# Altium PCB test.PcbDoc
Units mil, origin at the board's own origin, x right, y up, seen from the top; angles counter-clockwise.
Board outline 6000 x 4000 mil, 2 copper layers (Top Layer, Bottom Layer); 227 components, 247 nets, 808 pads, 20 vias.
Unrouted connection lines stored in the file: 461.
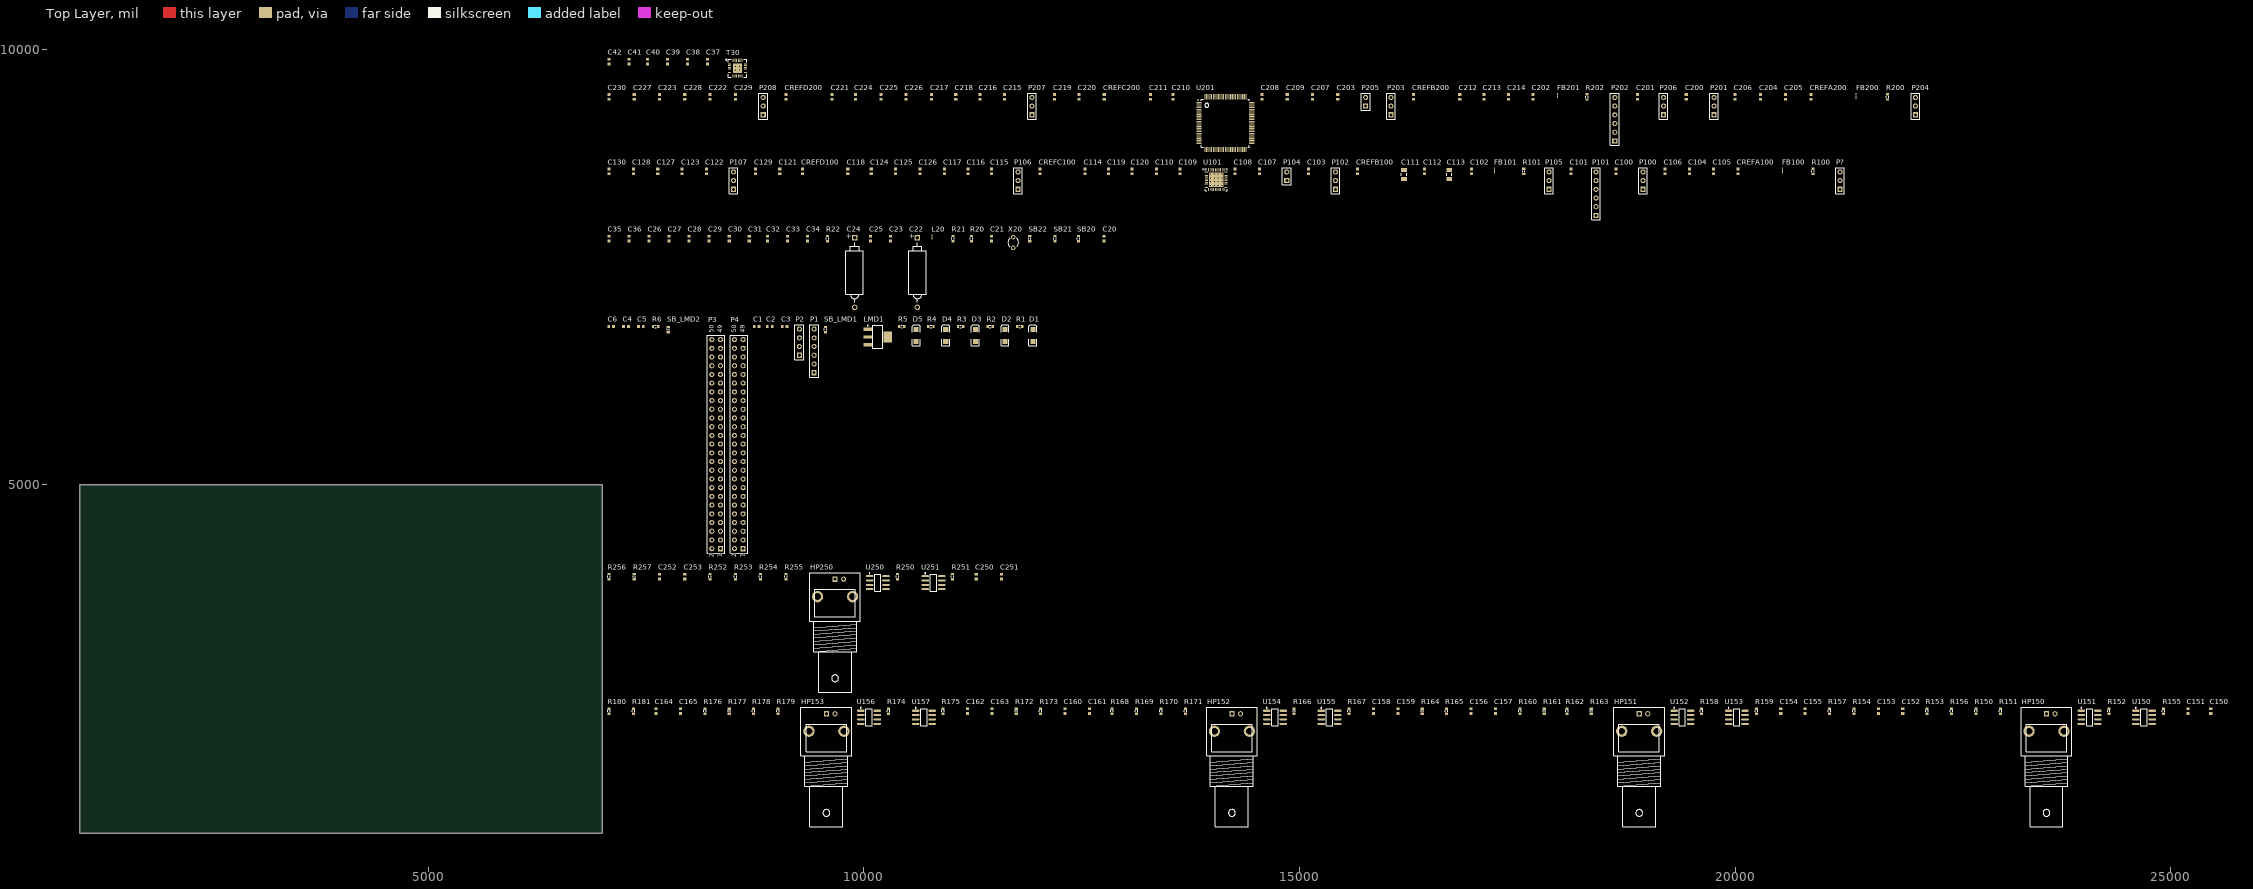
[diagram p0: Top Layer view]
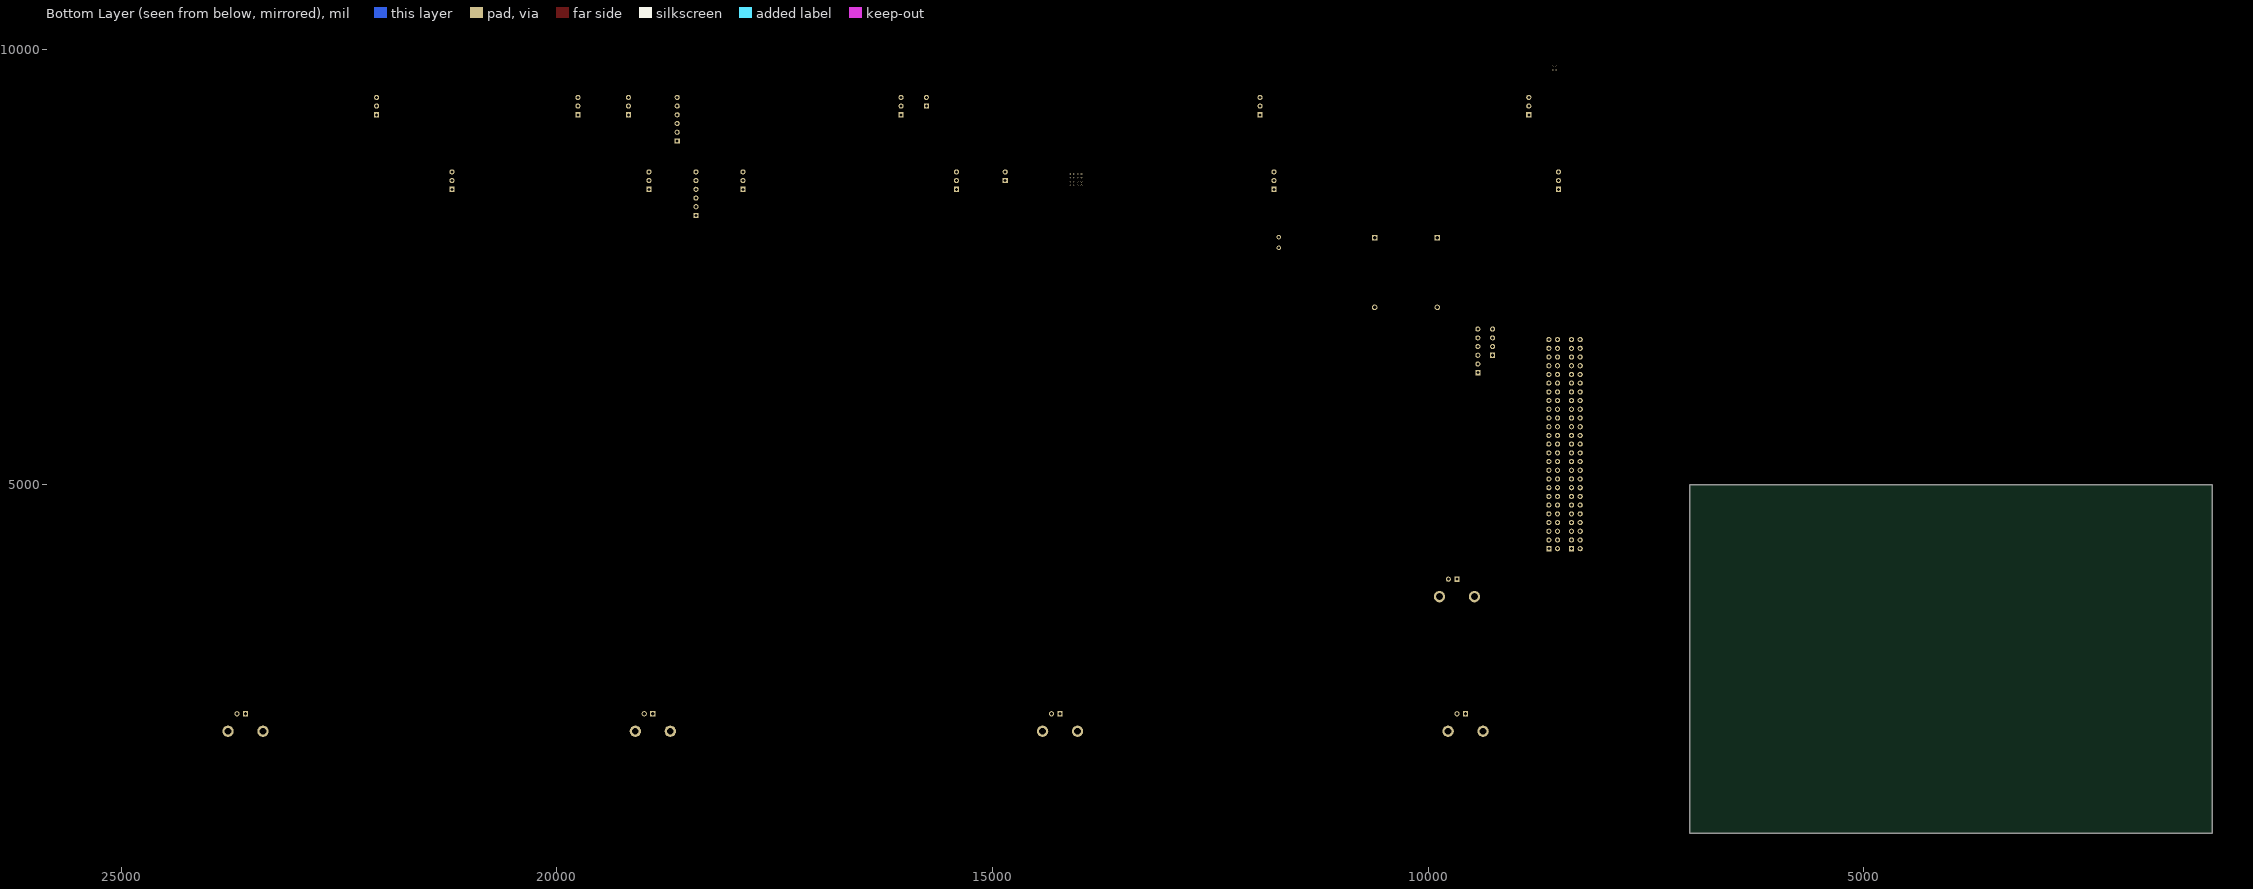
[diagram p1: Bottom Layer view, seen from below]

## Layer stack, top to bottom
Top Solder: solder mask 0.4, Solder Resist, Dk 3.5
Top Layer: signal copper 1.4
Dielectric 1: dielectric 12.6, FR-4, Dk 4.8
Bottom Layer: signal copper 1.4
Bottom Solder: solder mask 0.4, Solder Resist, Dk 3.5

## Board outline
1000,1000 7000,1000 7000,5000 1000,5000

## Design rules (kind name [scope] priority, off if disabled: settings)
Clearance [All] p1: gap=10
PolygonConnect [All] p1: connectstyle=Relief reliefconductorwidth=10 reliefentries=4 polygonreliefangle="90 Angle" airgapwidth=10
RoomDefinition U_RS-232 [InComponentClass('U_RS-232')] p1: confinementstyle=ConfineIn formatcopy=TRUE lockcomponents=FALSE outline 7045,9650 8680,9650 8680,10010 7045,10010
RoomDefinition U_MAXIM-ADC2 [InComponentClass('U_MAXIM-ADC2')] p2: confinementstyle=ConfineIn formatcopy=TRUE lockcomponents=FALSE outline 7045,8795 22265,8795 22265,9605 7045,9605
RoomDefinition U_MAXIM-ADC1 [InComponentClass('U_MAXIM-ADC1')] p3: confinementstyle=ConfineIn formatcopy=TRUE lockcomponents=FALSE outline 7045,8030 21280,8030 21280,8750 7045,8750
RoomDefinition U1 [InComponentClass('U1')] p4: confinementstyle=ConfineIn formatcopy=TRUE lockcomponents=FALSE outline 7045,6990 12920,6990 12920,7980 7045,7980
RoomDefinition HANC1.0_SCH [InComponentClass('HANC1.0_SCH')] p5: confinementstyle=ConfineIn formatcopy=TRUE lockcomponents=FALSE outline 7045,4150 12000,4150 12000,6945 7045,6945
RoomDefinition Filter_1 [InComponentClass('Filter1')] p6: confinementstyle=ConfineIn formatcopy=TRUE lockcomponents=FALSE outline 7045,2605 11785,2605 11785,4100 7045,4100
RoomDefinition Filter1 [InComponentClass('Filter1')] p7: confinementstyle=ConfineIn formatcopy=TRUE lockcomponents=FALSE outline 7045,2605 11785,2605 11785,4100 7045,4100
RoutingVias [All] p1: holewidth=28 width=50 viastyle="Through Hole" minholewidth=28 minwidth=50 maxholewidth=28 maxwidth=50
SolderMaskExpansion [All] p1: expansion=4
Width [All] p1: maxlimit=10 minlimit=10 preferedwidth=10
30 further rules are at their usual default settings.

## Classes and differential pairs
component class U_RS-232: C37 C38 C39 C40 C41 C42 T30
component class U_MAXIM-ADC2: C200 C201 C202 C203 C204 C205 C206 C207 C208 C209 C210 C211 C212 C213 C214 C215 C216 C217 C218 C219 C220 C221 C222 C223 C224 C225 C226 C227 C228 C229 C230 CREFA200 CREFB200 CREFC200 CREFD200 FB200 FB201 P201 P202 P203 P204 P205 P206 P207 P208 R200 R202 U200 U201 U202 U203
component class U_MAXIM-ADC1: C100 C101 C102 C103 C104 C105 C106 C107 C108 C109 C110 C111 C112 C113 C114 C115 C116 C117 C118 C119 C120 C121 C122 C123 C124 C125 C126 C127 C128 C129 C130 CREFA100 CREFB100 CREFC100 CREFD100 FB100 FB101 P100 P101 P102 P104 P105 P106 P107 P? R100 R101 U100 U101 U102 U103
component class U1: C20 C21 C22 C23 C24 C25 C26 C27 C28 C29 C30 C31 C32 C33 C34 C35 C36 L20 R20 R21 R22 SB20 SB21 SB22 U20 X20
component class HANC1.0_SCH: C1 C2 C3 C4 C5 C6 D1 D2 D3 D4 D5 LMA1 LMD1 P1 P2 P3 P4 R1 R2 R3 R4 R5 R6 SB_LMD1 SB_LMD2
component class Filter1: C250 C251 C252 C253 HP250 R250 R251 R252 R253 R254 R255 R256 R257 U250 U251

## Components (designator, comment, footprint, x,y, rotation, side; value= is the part's Value field where it differs from the comment)
C1 "Cap Semi" 1608[0603] 8770,6815 r0 top
C2 "Cap" 1608[0603] 8920,6815 r0 top
C3 "Cap Semi" 1608[0603] 9090,6815 r0 top
C4 "Cap Semi" 1608[0603] 7270,6815 r0 top
C5 "Cap Semi" 1608[0603] 7440,6815 r0 top
C6 "Cap Semi" 1608[0603] 7100,6815 r0 top
C20 "Cap" 1608[0603] 12755,7825 r90 top
C21 "Cap" 1608[0603] 11465,7825 r90 top
C22 "Cap Pol2" POLAR0.8 10615,7435 r90 top
C23 "Cap Semi" 1608[0603] 10305,7825 r90 top
C24 "Cap Pol2" POLAR0.8 9895,7435 r90 top
C25 "Cap Semi" 1608[0603] 10075,7825 r90 top
C26 "Cap Semi" 1608[0603] 7535,7825 r90 top
C27 "Cap Semi" 1608[0603] 7765,7825 r90 top
C28 "Cap Semi" 1608[0603] 7995,7825 r90 top
C29 "Cap Semi" 1608[0603] 8225,7825 r90 top
C30 "Cap Semi" 1608[0603] 8455,7825 r90 top
C31 "Cap Semi" 1608[0603] 8685,7825 r90 top
C32 "Cap Semi" 1608[0603] 8895,7825 r90 top
C33 "Cap Semi" 1608[0603] 9125,7825 r90 top
C34 "Cap Semi" 1608[0603] 9355,7825 r90 top
C35 "Cap Semi" 1608[0603] 7075,7825 r90 top
C36 "Cap Semi" 1608[0603] 7305,7825 r90 top
C37 "Cap Semi" 1608[0603] 8205,9855 r90 top
C38 "Cap Semi" 1608[0603] 7975,9855 r90 top
C39 "Cap Semi" 1608[0603] 7745,9855 r90 top
C40 "Cap Semi" 1608[0603] 7515,9855 r90 top
C41 "Cap Semi" 1608[0603] 7305,9855 r90 top
C42 "Cap Semi" 1608[0603] 7075,9855 r90 top
C100 "Cap Semi" 1608[0603] 18635,8595 r90 top
C101 "Cap Semi" 1608[0603] 18115,8595 r90 top
C102 "Cap Semi" 1608[0603] 16975,8595 r90 top
C103 "Cap Semi" 1608[0603] 15105,8595 r90 top
C104 "Cap Semi" 1608[0603] 19475,8595 r90 top
C105 "Cap Semi" 1608[0603] 19755,8595 r90 top
C106 "Cap" 1608[0603] 19195,8595 r90 top
C107 "Cap Semi" 1608[0603] 14540,8595 r90 top
C108 "Cap Semi" 1608[0603] 14260,8595 r90 top
C109 "Cap Semi" 1608[0603] 13630,8595 r90 top
C110 "Cap Semi" 1608[0603] 13360,8595 r90 top
C111 "Cap Semi" C1206 16200,8560 r90 top
C112 "Cap Semi" 1608[0603] 16435,8595 r90 top
C113 "Cap Semi" C1206 16720,8560 r90 top
C114 "Cap Semi" 1608[0603] 12540,8595 r90 top
C115 "Cap Semi" 1608[0603] 11465,8595 r90 top
C116 "Cap Semi" 1608[0603] 11195,8595 r90 top
C117 "Cap Semi" 1608[0603] 10925,8595 r90 top
C118 "Cap Semi" 1608[0603] 9815,8595 r90 top
C119 "Cap Semi" 1608[0603] 12810,8595 r90 top
C120 "Cap Semi" 1608[0603] 13080,8595 r90 top
C121 "Cap Semi" 1608[0603] 9035,8595 r90 top
C122 "Cap Semi" 1608[0603] 8195,8595 r90 top
C123 "Cap Semi" 1608[0603] 7915,8595 r90 top
C124 "Cap Semi" 1608[0603] 10085,8595 r90 top
C125 "Cap Semi" 1608[0603] 10365,8595 r90 top
C126 "Cap Semi" 1608[0603] 10645,8595 r90 top
C127 "Cap Semi" 1608[0603] 7635,8595 r90 top
C128 "Cap Semi" 1608[0603] 7355,8595 r90 top
C129 "Cap Semi" 1608[0603] 8755,8595 r90 top
C130 "Cap Semi" 1608[0603] 7075,8595 r90 top
C150 "Cap Semi" 1608[0603] 25460,2400 r90 top
C151 "Cap Semi" 1608[0603] 25200,2400 r90 top
C152 "Cap Semi" 1608[0603] 21925,2400 r90 top
C153 "Cap Semi" 1608[0603] 21645,2400 r90 top
C154 "Cap Semi" 1608[0603] 20525,2400 r90 top
C155 "Cap Semi" 1608[0603] 20805,2400 r90 top
C156 "Cap Semi" 1608[0603] 16970,2400 r90 top
C157 "Cap Semi" 1608[0603] 17250,2400 r90 top
C158 "Cap Semi" 1608[0603] 15850,2400 r90 top
C159 "Cap Semi" 1608[0603] 16130,2400 r90 top
C160 "Cap Semi" 1608[0603] 12310,2400 r90 top
C161 "Cap Semi" 1608[0603] 12590,2400 r90 top
C162 "Cap Semi" 1608[0603] 11190,2400 r90 top
C163 "Cap Semi" 1608[0603] 11470,2400 r90 top
C164 "Cap Semi" 1608[0603] 7615,2400 r90 top
C165 "Cap Semi" 1608[0603] 7895,2400 r90 top
C200 "Cap Semi" 1608[0603] 19440,9450 r90 top
C201 "Cap Semi" 1608[0603] 18880,9450 r90 top
C202 "Cap Semi" 1608[0603] 17680,9450 r90 top
C203 "Cap Semi" 1608[0603] 15440,9450 r90 top
C204 "Cap Semi" 1608[0603] 20290,9450 r90 top
C205 "Cap Semi" 1608[0603] 20580,9450 r90 top
C206 "Cap Semi" 1608[0603] 20000,9450 r90 top
C207 "Cap Semi" 1608[0603] 15150,9450 r90 top
C208 "10uF" 1608[0603] 14570,9450 r90 top
C209 "Cap Semi" 1608[0603] 14860,9450 r90 top
C210 "Cap Semi" 1608[0603] 13550,9450 r90 top
C211 "Cap Semi" 1608[0603] 13290,9450 r90 top
C212 "Cap Semi" 1608[0603] 16840,9450 r90 top
C213 "Cap Semi" 1608[0603] 17120,9450 r90 top
C214 "Cap Semi" 1608[0603] 17400,9450 r90 top
C215 "Cap Semi" 1608[0603] 11615,9450 r90 top
C216 "Cap Semi" 1608[0603] 11335,9450 r90 top
C217 "Cap Semi" 1608[0603] 10775,9450 r90 top
C218 "Cap Semi" 1608[0603] 11055,9450 r90 top
C219 "Cap Semi" 1608[0603] 12190,9450 r90 top
C220 "Cap Semi" 1608[0603] 12470,9450 r90 top
C221 "Cap Semi" 1608[0603] 9635,9450 r90 top
C222 "Cap Semi" 1608[0603] 8235,9450 r90 top
C223 "Cap Semi" 1608[0603] 7655,9450 r90 top
C224 "Cap Semi" 1608[0603] 9905,9450 r90 top
C225 "Cap Semi" 1608[0603] 10195,9450 r90 top
C226 "Cap Semi" 1608[0603] 10485,9450 r90 top
C227 "Cap Semi" 1608[0603] 7365,9450 r90 top
C228 "Cap Semi" 1608[0603] 7945,9450 r90 top
C229 "Cap Semi" 1608[0603] 8525,9450 r90 top
C230 "Cap Semi" 1608[0603] 7075,9450 r90 top
C250 "Cap Semi" 1608[0603] 11290,3945 r90 top
C251 "Cap Semi" 1608[0603] 11580,3945 r90 top
C252 "Cap Semi" 1608[0603] 7655,3945 r90 top
C253 "Cap Semi" 1608[0603] 7945,3945 r90 top
CREFA100 "Cap Semi" 1608[0603] 20035,8595 r90 top
CREFA200 "Cap Semi" 1608[0603] 20870,9450 r90 top
CREFB100 "Cap Semi" 1608[0603] 15665,8595 r90 top
CREFB200 "Cap Semi" 1608[0603] 16310,9450 r90 top
CREFC100 "Cap Semi" 1608[0603] 12020,8595 r90 top
CREFC200 "Cap Semi" 1608[0603] 12760,9450 r90 top
CREFD100 "Cap Semi" 1608[0603] 9295,8595 r90 top
CREFD200 "Cap Semi" 1608[0603] 9105,9450 r90 top
D1 "LED2" 3.2X1.6X1.1 11940,6710 r90 top
D2 "LED2" 3.2X1.6X1.1 11620,6710 r90 top
D3 "LED2" 3.2X1.6X1.1 11280,6710 r90 top
D4 "LED2" 3.2X1.6X1.1 10940,6710 r90 top
D5 "LED2" 3.2X1.6X1.1 10600,6710 r90 top
FB100 "FerriteBead" 0603 20545,8615 r90 top
FB101 "FerriteBead" 0603 17240,8615 r90 top
FB200 "FerriteBead" 0603 21390,9470 r90 top
FB201 "FerriteBead" 0603 17960,9470 r90 top
HP150 "BNC" "BNC_RA CON" 23575,2370 r90 top
HP151 "BNC" "BNC_RA CON" 18900,2370 r90 top
HP152 "BNC" "BNC_RA CON" 14225,2370 r90 top
HP153 "BNC" "BNC_RA CON" 9570,2370 r90 top
HP250 "BNC" "BNC_RA CON" 9670,3915 r90 top
L20 "Inductor" 0603 10780,7845 r90 top
LMD1 "LM3940" SOT223_N 10160,6695 r0 top
P1 "SWD" HDR1X6 9430,6285 r90 top
P2 "4AUX" HDR1X4 9260,6485 r90 top
P3 "Header 25X2" HDR2X25 8355,4265 r90 top
P4 "Header 25X2" HDR2X25 8615,4265 r90 top
P100 "Header 3" HDR1X3 18945,8390 r90 top
P101 "Header 6" HDR1X6 18405,8090 r90 top
P102 "Header 3" HDR1X3 15415,8390 r90 top
P104 "Header 2" HDR1X2 14855,8490 r90 top
P105 "Header 3" HDR1X3 17865,8390 r90 top
P106 "Header 3" HDR1X3 11770,8390 r90 top
P107 "Header 3" HDR1X3 8505,8390 r90 top
P201 "Header 3" HDR1X3 19760,9245 r90 top
P202 "Header 6" HDR1X6 18620,8945 r90 top
P203 "Header 3" HDR1X3 16050,9245 r90 top
P204 "Header 3" HDR1X3 22070,9245 r90 top
P205 "Header 2" HDR1X2 15760,9345 r90 top
P206 "Header 3" HDR1X3 19180,9245 r90 top
P207 "Header 3" HDR1X3 11930,9245 r90 top
P208 "Header 3" HDR1X3 8845,9245 r90 top
P? "Header 3" HDR1X3 21205,8390 r90 top
R1 "Res3" J1-0603 11790,6815 r0 top
R2 "Res3" J1-0603 11450,6815 r0 top
R3 "Res3" J1-0603 11110,6815 r0 top
R4 "Res3" J1-0603 10770,6815 r0 top
R5 "Res3" J1-0603 10435,6815 r0 top
R6 "Res3" J1-0603 7610,6815 r0 top
R20 "Res3" J1-0603 11235,7825 r90 top
R21 "Res3" J1-0603 11025,7825 r90 top
R22 "Res3" J1-0603 9585,7825 r90 top
R100 "Res3" J1-0603 20895,8595 r90 top
R101 "Res3" J1-0603 17575,8595 r90 top
R150 "Res3" J1-0603 22765,2400 r90 top
R151 "Res3" J1-0603 23045,2400 r90 top
R152 "Res3" J1-0603 24290,2400 r90 top
R153 "Res3" J1-0603 22205,2400 r90 top
R154 "Res3" J1-0603 21365,2400 r90 top
R155 "Res3" J1-0603 24920,2400 r90 top
R156 "Res3" J1-0603 22485,2400 r90 top
R157 "Res3" J1-0603 21085,2400 r90 top
R158 "Res3" J1-0603 19615,2400 r90 top
R159 "Res3" J1-0603 20245,2400 r90 top
R160 "Res3" J1-0603 17530,2400 r90 top
R161 "Res3" J1-0603 17810,2400 r90 top
R162 "Res3" J1-0603 18070,2400 r90 top
R163 "Res3" J1-0603 18350,2400 r90 top
R164 "Res3" J1-0603 16410,2400 r90 top
R165 "Res3" J1-0603 16690,2400 r90 top
R166 "Res3" J1-0603 14940,2400 r90 top
R167 "Res3" J1-0603 15570,2400 r90 top
R168 "Res3" J1-0603 12850,2400 r90 top
R169 "Res3" J1-0603 13130,2400 r90 top
R170 "Res3" J1-0603 13410,2400 r90 top
R171 "Res3" J1-0603 13690,2400 r90 top
R172 "Res3" J1-0603 11750,2400 r90 top
R173 "Res3" J1-0603 12030,2400 r90 top
R174 "Res3" J1-0603 10285,2400 r90 top
R175 "Res3" J1-0603 10910,2400 r90 top
R176 "Res3" J1-0603 8175,2400 r90 top
R177 "Res3" J1-0603 8455,2400 r90 top
R178 "Res3" J1-0603 8735,2400 r90 top
R179 "Res3" J1-0603 9015,2400 r90 top
R180 "Res3" J1-0603 7075,2400 r90 top
R181 "Res3" J1-0603 7355,2400 r90 top
R200 "Res3" J1-0603 21750,9450 r90 top
R202 "Res3" J1-0603 18300,9450 r90 top
R250 "Res3" J1-0603 10385,3945 r90 top
R251 "Res3" J1-0603 11020,3945 r90 top
R252 "Res3" J1-0603 8235,3945 r90 top
R253 "Res3" J1-0603 8525,3945 r90 top
R254 "Res3" J1-0603 8815,3945 r90 top
R255 "Res3" J1-0603 9105,3945 r90 top
R256 "Res3" J1-0603 7075,3945 r90 top
R257 "Res3" J1-0603 7365,3945 r90 top
SB20 "Res3" J1-0603 12465,7825 r90 top
SB21 "Res3" J1-0603 12195,7825 r90 top
SB22 "Res3" J1-0603 11905,7825 r90 top
SB_LMD1 "Res3" J1-0603 9560,6780 r90 top
SB_LMD2 "Res3" J1-0603 7755,6780 r90 top
T30 "TRS3122" QFN50P485X485X100_HS-25N 8550,9780 r0 top
U101 "MAX11043" QFN50P600X600X80_HS-41N 14045,8500 r0 top
U150 "OP262TRZ-EP" ADI-R-8_N 24695,2330 r0 top
U151 "OP262TRZ-EP" ADI-R-8_N 24070,2330 r0 top
U152 "OP262TRZ-EP" ADI-R-8_N 19395,2330 r0 top
U153 "OP262TRZ-EP" ADI-R-8_N 20020,2330 r0 top
U154 "OP262TRZ-EP" ADI-R-8_N 14720,2330 r0 top
U155 "OP262TRZ-EP" ADI-R-8_N 15345,2330 r0 top
U156 "OP262TRZ-EP" ADI-R-8_N 10060,2330 r0 top
U157 "OP262TRZ-EP" ADI-R-8_N 10690,2330 r0 top
U201 "MAX11043" QFP50P1600X1600X160-100N 14150,9150 r0 top
U250 "OP262TRZ-EP" ADI-R-8_N 10160,3875 r0 top
U251 "OP262TRZ-EP" ADI-R-8_N 10800,3875 r0 top
X20 "16MHz" R38 11715,7780 r0 top

## Footprints (in the part's own frame and the unit in brackets; to place one, negate y for a bottom-side part, rotate by r counter-clockwise, add the part's x,y. Pads: shape width x height; smd on the part's side, far side on the other; paste and mask are expansions set on the pad)
3.2X1.6X1.1 [mm] "SMT LED; 2 Flat Leads"
  rect 1.5x1.5 smd: 1(-1.75,0) 2(1.75,0)
  silkscreen extent -2.9,-1.15 3.2,1.15
0603 [mm] "Chip Inductor, Body 0.6x0.3mm, IPC High Density"
  rect 0.5x0.3 smd: 1(-0.35,0) 2(0.35,0)
  silkscreen extent -0.9,-0.05 -0.9,0.05, body extent -0.33,-0.18 0.33,0.18, height 0.55
1608[0603] [mm] "Chip Capacitor, Body 1.6x0.8mm, IPC High Density"
  rect 0.8x0.9 smd: 1(-0.7,0) 2(0.7,0)
  body extent -0.87,-0.48 0.87,0.48, height 1.3
ADI-R-8_N [mm] "SOIC, 8-Leads, Body 4.9x3.9mm, Pitch 1.27mm, IPC Medium Density"
  oval 2.2x0.6 smd: 1(-2.4,1.905) 2(-2.4,0.635) 3(-2.4,-0.635) 4(-2.4,-1.905) 5(2.4,-1.905) 6(2.4,-0.635) 7(2.4,0.635) 8(2.4,1.905)
  silkscreen extent -2.52,-2.5 0.9,2.88, body extent -2,-2.5 2,2.5, height 1.75
"BNC_RA CON" [mm] "Connector; BNC Elbow"
  rect 1.5x1.5 hole 0.9: 1(0,0)
  round 3.3 hole 2: 2(-5.1,-5.1) 2(-5.1,5.1)
  round 1.5 hole 0.9: 2(0,-2.5)
  silkscreen extent -33,-7.4 1.9,7.4
C1206 [mm] "Chip Capacitor, Body 3.2x1.6mm, IPC High Density"
  rect 1.1x1.7 smd: 1(-1.35,0) 2(1.35,0)
  silkscreen extent -0.4,-0.75 0.4,0.75, body extent -1.7,-0.9 1.7,0.9, height 1.3
HDR1X2 [mm] "Connector; Header; 2 Position"
  rect 1.5x1.5 hole 0.9: 1(0,0)
  round 1.5 hole 0.9: 2(2.54,0)
  silkscreen extent -1.27,-1.27 3.81,1.27
HDR1X3 [mm] "Connector; Header; 3 Position"
  rect 1.5x1.5 hole 0.9: 1(0,0)
  round 1.5 hole 0.9: 2(2.54,0) 3(5.08,0)
  silkscreen extent -1.27,-1.27 6.35,1.27
HDR1X4 [mm] "Connector; Header; 4 Position"
  rect 1.5x1.5 hole 0.9: 1(0,0)
  round 1.5 hole 0.9: 2(2.54,0) 3(5.08,0) 4(7.62,0)
  silkscreen extent -1.27,-1.27 8.89,1.27
HDR1X6 [mm] "Connector; Header; 6 Position"
  rect 1.5x1.5 hole 0.9: 1(0,0)
  round 1.5 hole 0.9: 2(2.54,0) 3(5.08,0) 4(7.62,0) 5(10.16,0) 6(12.7,0)
  silkscreen extent -1.27,-1.27 13.97,1.27
HDR2X25 [mm] "Connector; Header; 25x2 Position"
  rect 1.5x1.5 hole 0.9: 1(0,0)
  round 1.5 hole 0.9: 2(0,2.54) 3(2.54,0) 4(2.54,2.54) 5(5.08,0) 6(5.08,2.54) 7(7.62,0) 8(7.62,2.54) 9(10.16,0) 10(10.16,2.54) 11(12.7,0) 12(12.7,2.54) 13(15.24,0) 14(15.24,2.54) 15(17.78,0) 16(17.78,2.54) 17(20.32,0) 18(20.32,2.54) 19(22.86,0) 20(22.86,2.54) 21(25.4,0) 22(25.4,2.54) 23(27.94,0) 24(27.94,2.54) 25(30.48,0) 26(30.48,2.54) 27(33.02,0) 28(33.02,2.54) 29(35.56,0) 30(35.56,2.54) 31(38.1,0) 32(38.1,2.54) 33(40.64,0) 34(40.64,2.54) 35(43.18,0) 36(43.18,2.54) 37(45.72,0) 38(45.72,2.54) 39(48.26,0) 40(48.26,2.54) 41(50.8,0) 42(50.8,2.54) 43(53.34,0) 44(53.34,2.54) 45(55.88,0) 46(55.88,2.54) 47(58.42,0) 48(58.42,2.54) 49(60.96,0) 50(60.96,2.54)
  silkscreen extent -1.27,-1.27 62.23,3.81
J1-0603 [mm] "Chip Resistor, Body 1.6x0.8mm, IPC High Density"
  rect 0.7x0.9 smd: 1(-0.75,0) 2(0.75,0)
  silkscreen extent -0.2,-0.35 0.2,0.35, body extent -0.85,-0.48 0.85,0.48, height 0.9
POLAR0.8 [mm] "Polarized Capacitor; 2 Leads"
  rect 1.6x1.6 hole 1: 1(10.16,0)
  round 1.6 hole 1: 2(-10.16,0)
  silkscreen extent -8.64,-2.54 8.64,2.54
QFN50P485X485X100_HS-25N [mm] "QFN, 24-Leads, Body 4.85x4.85mm, Pitch 0.50mm, Thermal Pad 2.70x2.70mm, IPC Medium Density"
  oval 0.95x0.25 smd: 1(-2.3,1.25) 2(-2.3,0.75) 3(-2.3,0.25) 4(-2.3,-0.25) 5(-2.3,-0.75) 6(-2.3,-1.25) 13(2.3,-1.25) 14(2.3,-0.75) 15(2.3,-0.25) 16(2.3,0.25) 17(2.3,0.75) 18(2.3,1.25)
  oval 0.25x0.95 smd: 7(-1.25,-2.3) 8(-0.75,-2.3) 9(-0.25,-2.3) 10(0.25,-2.3) 11(0.75,-2.3) 12(1.25,-2.3) 19(1.25,2.3) 20(0.75,2.3) 21(0.25,2.3) 22(-0.25,2.3) 23(-0.75,2.3) 24(-1.25,2.3)
  rect 2.7x2.7 smd: 25(0,0)
  silkscreen extent -3.4,-2.62 2.62,2.63, body extent -2.48,-2.47 2.47,2.48, height 1
QFN50P600X600X80_HS-41N [mm] "QFN, 40-Leads, Body 6.00x6.00mm, Pitch 0.50mm, Thermal Pad 4.10x4.10mm, IPC Medium Density"
  oval 0.95x0.25 smd: 1(-2.875,2.25) 2(-2.875,1.75) 3(-2.875,1.25) 4(-2.875,0.75) 5(-2.875,0.25) 6(-2.875,-0.25) 7(-2.875,-0.75) 8(-2.875,-1.25) 9(-2.875,-1.75) 10(-2.875,-2.25) 21(2.875,-2.25) 22(2.875,-1.75) 23(2.875,-1.25) 24(2.875,-0.75) 25(2.875,-0.25) 26(2.875,0.25) 27(2.875,0.75) 28(2.875,1.25) 29(2.875,1.75) 30(2.875,2.25)
  oval 0.25x0.95 smd: 11(-2.25,-2.875) 12(-1.75,-2.875) 13(-1.25,-2.875) 14(-0.75,-2.875) 15(-0.25,-2.875) 16(0.25,-2.875) 17(0.75,-2.875) 18(1.25,-2.875) 19(1.75,-2.875) 20(2.25,-2.875) 31(2.25,2.875) 32(1.75,2.875) 33(1.25,2.875) 34(0.75,2.875) 35(0.25,2.875) 36(-0.25,2.875) 37(-0.75,2.875) 38(-1.25,2.875) 39(-1.75,2.875) 40(-2.25,2.875)
  rect 4.1x4.1 smd: 41(0,0)
  silkscreen extent -3.97,-3.2 3.2,3.2, body extent -3.05,-3.05 3.05,3.05, height 0.8
QFP50P1600X1600X160-100N [mm]
  rect 1.5x0.3 smd paste-25.4 mask-25.4: 1(-7.67,6) 2(-7.67,5.5) 3(-7.67,5) 4(-7.67,4.5) 5(-7.67,4) 6(-7.67,3.5) 7(-7.67,3) 8(-7.67,2.5) 9(-7.67,2) 10(-7.67,1.5) 11(-7.67,1) 12(-7.67,0.5) 13(-7.67,0) 14(-7.67,-0.5) 15(-7.67,-1) 16(-7.67,-1.5) 17(-7.67,-2) 18(-7.67,-2.5) 19(-7.67,-3) 20(-7.67,-3.5) 21(-7.67,-4) 22(-7.67,-4.5) 23(-7.67,-5) 24(-7.67,-5.5) 25(-7.67,-6) 51(7.67,-6) 52(7.67,-5.5) 53(7.67,-5) 54(7.67,-4.5) 55(7.67,-4) 56(7.67,-3.5) 57(7.67,-3) 58(7.67,-2.5) 59(7.67,-2) 60(7.67,-1.5) 61(7.67,-1) 62(7.67,-0.5) 63(7.67,0) 64(7.67,0.5) 65(7.67,1) 66(7.67,1.5) 67(7.67,2) 68(7.67,2.5) 69(7.67,3) 70(7.67,3.5) 71(7.67,4) 72(7.67,4.5) 73(7.67,5) 74(7.67,5.5) 75(7.67,6)
  rect 0.3x1.5 smd paste-25.4 mask-25.4: 26(-6,-7.67) 27(-5.5,-7.67) 28(-5,-7.67) 29(-4.5,-7.67) 30(-4,-7.67) 31(-3.5,-7.67) 32(-3,-7.67) 33(-2.5,-7.67) 34(-2,-7.67) 35(-1.5,-7.67) 36(-1,-7.67) 37(-0.5,-7.67) 38(0,-7.67) 39(0.5,-7.67) 40(1,-7.67) 41(1.5,-7.67) 42(2,-7.67) 43(2.5,-7.67) 44(3,-7.67) 45(3.5,-7.67) 46(4,-7.67) 47(4.5,-7.67) 48(5,-7.67) 49(5.5,-7.67) 50(6,-7.67) 76(6,7.67) 77(5.5,7.67) 78(5,7.67) 79(4.5,7.67) 80(4,7.67) 81(3.5,7.67) 82(3,7.67) 83(2.5,7.67) 84(2,7.67) 85(1.5,7.67) 86(1,7.67) 87(0.5,7.67) 88(0,7.67) 89(-0.5,7.67) 90(-1,7.67) 91(-1.5,7.67) 92(-2,7.67) 93(-2.5,7.67) 94(-3,7.67) 95(-3.5,7.67) 96(-4,7.67) 97(-4.5,7.67) 98(-5,7.67) 99(-5.5,7.67) 100(-6,7.67)
  silkscreen extent -8.1,-7 7,7
R38 [mm] "Crystal, Thru-Hole; 2 Leads; Body 3.1 x 8.2 mm (Dia.xH)"
  round 1.3 hole 0.7: 1(0,1.55) 2(0,-1.55)
  silkscreen extent -1.55,-1.19 1.55,1.17
SOT223_N [mm] "SOT223, 4-Leads, Body 6.5x3.5mm, Pitch 2.3mm, Lead Span 7mm, IPC Medium Density"
  rect 2.4x1 smd: 1(-2.9,2.3) 2(-2.9,0) 3(-2.9,-2.3)
  rect 2.4x3.3 smd: 4(2.9,0)
  silkscreen extent -3.02,-3.35 1.4,3.47, body extent -1.85,-3.35 1.85,3.35, height 1.7

## Part data
C1 C3 C4 C5 C6 C23 C25 C26 C27 C28 C29 C30 C31 C32 C33 C34 C35 C36 C37 C38 C39 C40 C41 C42 C100 C101 C102 C103 C104 C105 C107 C108 C109 C110 C111 C112 C113 C114 C115 C116 C117 C118 C119 C120 C121 C122 C123 C124 C125 C126 C127 C128 C129 C130 C150 C151 C152 C153 C154 C155 C156 C157 C158 C159 C160 C161 C162 C163 C164 C165 C200 C201 C202 C203 C204 C205 C206 C207 C209 C210 C211 C212 C213 C214 C215 C216 C217 C218 C219 C220 C221 C222 C223 C224 C225 C226 C227 C228 C229 C230 C250 C251 C252 C253 CREFA100 CREFA200 CREFB100 CREFB200 CREFC100 CREFC200 CREFD100 CREFD200: "Capacitor (Semiconductor SIM Model)"
C2 C20 C21 C106 C208: library part "Cap Semi", "Capacitor (Semiconductor SIM Model)"
C22 C24: "Polarized Capacitor (Axial)"
D1 D2 D3 D4 D5: "Typical RED, GREEN, YELLOW, AMBER GaAs LED"
FB100 FB101 FB200 FB201: library part Inductor, "Inductor"
HP150 HP151 HP152 HP153 HP250: "BNC Elbow Connector"
LMD1 T30: library part Component_1
P1: library part "Header 6", "Header, 6-Pin"
P2: library part "Header 4", "Header, 4-Pin"
P3 P4: "Header, 25-Pin, Dual row"
P100 P102 P105 P106 P107 P201 P203 P204 P206 P207 P208 P?: "Header, 3-Pin"
P101 P202: "Header, 6-Pin"
P104 P205: "Header, 2-Pin"
R1 R2 R3 R4 R5 R6 R20 R21 R22 R100 R101 R150 R151 R152 R153 R154 R155 R156 R157 R158 R159 R160 R161 R162 R163 R164 R165 R166 R167 R168 R169 R170 R171 R172 R173 R174 R175 R176 R177 R178 R179 R180 R181 R200 R202 R250 R251 R252 R253 R254 R255 R256 R257 SB21 SB_LMD1 SB_LMD2: "Resistor"
SB20: "SB PH0"
SB22: "SB_PH1"
U150 U151 U152 U153 U154 U155 U156 U157 U250 U251: "Double Channel Wide Bandwidth Operational Amplifier, 15 MHz BW, 13 V/us SR, Military, 8-pin SOIC (R-8), Tube"
X20: library part XTAL, "Crystal Oscillator"

## Via types
v1: diameter 19.68, hole 7.87, Top Layer to Bottom Layer, 20 vias

## Nets (pads, with @x,y where several pads share a name; then routed paths per layer and width w, separated by ;. In a path a pad name is that pad's centre, name@x,y a point inside that pad or via, vN(x,y) a via of type N, cw(c..) or ccw(c..) an arc to the next point about the centre after c; other vN are vias at no path point)
5V: P2.1 P4.3 P4.4 SB_LMD1.1 SB_LMD2.1
A3V3: C4.2 P204.3 P?.3
AGND: C2.1 C4.1 C104.2 C105.2 C106.2 C109.2 C110.2 C114.2 C121.1 C124.1 C125.2 C126.1 C129.2 C130.1 C152.1 C156.1 C157.1 C160.1 C161.1 C164.1 C165.1 C204.2 C205.2 C206.2 C209.2 C210.2 C211.2 C221.1 C224.1 C225.2 C226.1 C229.2 C230.1 C252.1 C253.1 CREFA100.1 CREFA200.1 CREFB100.1 CREFB200.1 CREFC100.1 CREFC200.1 CREFD100.1 CREFD200.1 HP151.2 HP152.2 HP153.2 HP250.2 LMD1.4 P2.4 P100.3 P102.3 P106.3 P107.3 P201.3 P203.3 P207.3 P208.3 R6.2 R154.1 R157.1 R164.1 R165.1 R172.1 R173.1 R180.1 R181.1 R256.1 R257.1 U101.6 U101.17 U101.24 U101.33 U101.35 U150.4 U151.4 U152.4 U153.4 U154.4 U155.4 U156.4 U157.4 U201.6 U201.17 U201.24 U201.33 U201.35 U250.4 U251.4
AINAP1: C102.1 C150.2 P101.1 R155.2 U150.7
AINAP2: C202.1 C251.2 P202.1 R251.2 U251.7
AINBP1: C108.1 C155.2 P101.2 R159.2 U153.7
AINBP2: C208.1 P202.2
AINCP1: C117.1 C159.2 P101.3 R167.2 U155.7
AINCP2: C216.1 C217.1 C217.2 P202.3 U201.37
AINDP1: C127.1 C163.2 P101.4 R175.2 U157.7
AINDP2: C227.1 P202.4
AOUT1: P101.5 U101.25
AOUT2: P202.5 U201.25
AVDD: C106.1 C110.1 C114.1 C121.2 C130.2 FB100.2 R100.2 U150.8 U151.8 U152.8 U153.8 U154.8 U155.8 U156.8 U157.8 U250.8 U251.8
BOOT0: P4.21
D3V3: C2.2 LMD1.3 P105.3 P206.3
DGND: C1.1 C3.1 C5.1 C6.1 C20.2 C21.2 C22.2 C23.1 C24.2 C25.2 C35.1 C36.1 C39.2 C41.2 C42.2 C111.2 C112.2 C113.2 C119.2 C120.2 C212.2 C213.2 C214.2 C219.2 C220.2 D1.2 D2.2 D3.2 D4.2 D5.2 LMD1.2 P1.3 P3.1 P3.2 P3.5 P3.23 P3.49 P3.50 P4.1 P4.2 P4.49 P4.50 R6.1 T30.17 U101.7 U101.23 U201.7 U201.23
DVDD: C26.1 C26.2 C27.1 C27.2 C28.1 C28.2 C29.1 C29.2 C30.1 C30.2 C31.1 C31.2 C32.1 C32.2 C33.1 C33.2 C34.1 C111.1 FB101.2 L20.1 P1.1 P3.3 P3.4 P4.5 P4.6 P4.22 R22.2 R101.2
M1_AVDD: C206.1 C209.1 C221.2 C230.2 FB200.2 R200.2
M1_DVDD: C212.1 FB201.2 R202.2
MAX1_OSCOUT: C1.2 U101.20
MAX2_OSCOUT: C6.2 U201.20
MAXIM_AVDD1: C104.1 C105.1 R100.1 U101.5 U101.26
MAXIM_AVDD2: C204.1 C205.1 R200.1 U201.5 U201.26
MAXIM_DVDD1: C112.1 C113.1 R101.1 U101.8 U101.22
MAXIM_DVDD2: C213.1 C214.1 R202.1 U201.8 U201.22
NetC3_2: C3.2 LMD1.1 SB_LMD1.2
NetC5_2: C5.2 SB_LMD2.2
NetC20_1: C20.1 SB21.1 X20.2
NetC21_1: C21.1 R20.1 X20.1
NetC22_1: C22.1 C23.2 R21.2
NetC24_1: C24.1 C25.1 L20.2 R21.1
NetC34_2: C34.2 R22.1
NetC35_2: C35.2
NetC36_2: C36.2
NetC37_1: C37.1 T30.21
NetC37_2: C37.2 T30.16
NetC38_1: C38.1 T30.22
NetC38_2: C38.2 T30.23
NetC40_1: C40.1 T30.1
NetC40_2: C40.2 T30.2
NetC41_1: C41.1 T30.20
NetC42_1: C42.1 T30.24
NetC100_1: C100.1 P100.2
NetC100_2: C100.2 C101.2 U101.3
NetC101_1: C101.1 C102.2 U101.4
NetC103_1: C103.1 P102.2
NetC103_2: C103.2 C107.2 U101.1
NetC107_1: C107.1 C108.2 U101.40
NetC109_1: C109.1
NetC115_1: C115.1 P106.2
NetC115_2: C115.2 C116.2 U101.36
NetC116_1: C116.1 C117.2 U101.37
NetC118_1: C118.1
NetC118_2: C118.2
NetC119_1: C119.1 C120.1 U101.9
NetC122_1: C122.1 P107.2
NetC122_2: C122.2 C123.2 U101.31
NetC123_1: C123.1 C127.2 U101.32
NetC124_2: C124.2 U101.27
NetC125_1: C125.1 U101.28
NetC126_2: C126.2 U101.29
NetC128_1: C128.1
NetC128_2: C128.2
NetC150_1: C150.1 R150.2 R151.1
NetC151_1: C151.1 R153.2 R156.1
NetC151_2: C151.2 R150.1 R152.2 U151.7
NetC152_2: C152.2 R151.2 U150.5
NetC153_1: C153.1 HP150.2
NetC153_2: C153.2 R156.2 U151.5
NetC154_1: C154.1 R160.2 R161.1
NetC154_2: C154.2 R158.2 R162.1 U152.7
NetC155_1: C155.1 R162.2 R163.1
NetC156_2: C156.2 R161.2 U152.5
NetC157_2: C157.2 R163.2 U153.5
NetC158_1: C158.1 R168.2 R169.1
NetC158_2: C158.2 R166.2 R170.1 U154.7
NetC159_1: C159.1 R170.2 R171.1
NetC160_2: C160.2 R169.2 U154.5
NetC161_2: C161.2 R171.2 U155.5
NetC162_1: C162.1 R176.2 R177.1
NetC162_2: C162.2 R174.2 R178.1 U156.7
NetC163_1: C163.1 R178.2 R179.1
NetC164_2: C164.2 R177.2 U156.5
NetC165_2: C165.2 R179.2 U157.5
NetC200_1: C200.1 P201.2
NetC200_2: C200.2 C201.2 U201.3
NetC201_1: C201.1 C202.2 U201.4
NetC203_1: C203.1 P203.2
NetC203_2: C203.2 C207.2 U201.1
NetC207_1: C207.1 C208.2 U201.40
NetC210_1: C210.1
NetC211_1: C211.1
NetC215_1: C215.1 P207.2
NetC215_2: C215.2 C216.2 U201.36
NetC218_1: C218.1
NetC218_2: C218.2
NetC219_1: C219.1 C220.1 U201.9
NetC222_1: C222.1 P208.2
NetC222_2: C222.2 C223.2 U201.31
NetC223_1: C223.1 C227.2 U201.32
NetC224_2: C224.2 U201.27
NetC225_1: C225.1 U201.28
NetC226_2: C226.2 U201.29
NetC228_1: C228.1
NetC228_2: C228.2
NetC250_1: C250.1 R252.2 R253.1
NetC250_2: C250.2 R250.2 R254.1 U250.7
NetC251_1: C251.1 R254.2 R255.1
NetC252_2: C252.2 R253.2 U250.5
NetC253_2: C253.2 R255.2 U251.5
NetCREFA100_2: CREFA100.2 U101.2
NetCREFA200_2: CREFA200.2 U201.2
NetCREFB100_2: CREFB100.2 U101.39
NetCREFC100_2: CREFC100.2 U101.38
NetCREFC200_2: CREFC200.2 U201.38
NetCREFD100_2: CREFD100.2 U101.30
NetCREFD200_2: CREFD200.2 U201.30
NetD1_1: D1.1 R1.1
NetD2_1: D2.1 R2.1
NetD3_1: D3.1 R3.1
NetD4_1: D4.1 R4.1
NetD5_1: D5.1 R5.1
NetFB100_1: FB100.1 P?.2
NetFB101_1: FB101.1 P105.2
NetFB200_1: FB200.1 P204.2
NetFB201_1: FB201.1 P206.2
NetHP150_1: HP150.1 R153.1
NetHP151_1: HP151.1 R160.1
NetHP152_1: HP152.1 R168.1
NetHP153_1: HP153.1 R176.1
NetHP250_1: HP250.1 R252.1
NetP100_1: P100.1
NetP102_1: P102.1
NetP104_1: P104.1
NetP105_1: P105.1
NetP106_1: P106.1
NetP107_1: P107.1
NetP201_1: P201.1
NetP203_1: P203.1
NetP205_1: P205.1
NetP207_1: P207.1
NetP208_1: P208.1
NetP?_1: P?.1
NetR20_2: R20.2 SB22.1
NetR152_1: R152.1 R157.2 U151.6
NetR154_2: R154.2 R155.1 U150.6
NetR158_1: R158.1 R164.2 U152.6
NetR159_1: R159.1 R165.2 U153.6
NetR166_1: R166.1 R172.2 U154.6
NetR167_1: R167.1 R173.2 U155.6
NetR174_1: R174.1 R180.2 U156.6
NetR175_1: R175.1 R181.2 U157.6
NetR250_1: R250.1 R256.2 U250.6
NetR251_1: R251.1 R257.2 U251.6
NetSB20_1: SB20.1 SB21.2
NetU101_13: U101.13
NetU101_18: U101.18
NRST: P1.5 P3.6
PA0: P3.12
PA1: P3.11
PA2_USART2_TX: P3.14 T30.10
PA3_USART2_RX: P3.13 T30.11
PA4: P3.16
PA5_SCLK: P3.15 U101.16 U201.16
PA6_MISO: P3.18 U101.14 U201.14
PA7_MOSI: P3.17 U101.15 U201.15
PA8_MCO1: P4.43 U101.19
PA9: P4.44
PA10: P4.41
PA11: 
PA12: 
PA13_SWDIO: P1.4 P4.42
PA14_SWCLK: P1.2 P4.39
PA15: P4.40
PB0_SHDN1: P3.22 U101.21
PB1_UP-DWN1: P3.21 U101.10
PB2_DACSTEP1: P3.24 U101.11
PB3_SWO: P1.6 P4.28
PB4: P4.25
PB5: P4.26
PB6: P4.23
PB7: P4.24
PB8: P4.19
PB9: P4.20
PB10: P3.34
PB10_CONVRUN1: U101.12
PB12_EOC2: P3.36 U201.18
PB13_EOC1: P3.37
PB14: P3.38
PB15: P3.39
PC0_FORCEON: P3.8 T30.14
PC1_FORCEOFF: P3.7 T30.15
PC2_INVALID: P3.10 T30.13
PC3: P3.9
PC4: P3.20
PC5: P3.19
PC6: P4.47
PC7: P4.48
PC8: P4.45
PC9_MCO2: P4.46 U201.19
PC10: P4.37
PC11: P4.38
PC12: P4.35
PC13: P4.12
PC14: P4.9
PC15: P4.10
PD0_CS1: P4.36
PD1_CS2: P4.33 U201.13
PD2: P4.34
PD3: P4.31
PD4: P4.32
PD5: P4.29
PD6: P4.30
PD7: P4.27
PD8: P3.40
PD9: P3.41
PD10_SHDN2: P3.42 U201.21
PD11_UP-DWN2: P3.43 U201.10
PD12_DACSTEP2: P3.44 U201.11
PD13_LED1: P3.45 R1.2
PD14_LED2: P3.46 R2.2
PD15_LED3: P3.47 R3.2
PE0_LED4: P4.17 R4.2
PE1_LED5: P4.18 R5.2
PE2: P4.15
PE3: P4.16
PE4: P4.13
PE5: P4.14
PE6: P4.11
PE7: P3.25
PE8: P3.26
PE9: P3.27
PE10: P3.28
PE11: P3.29
PE12: P3.30
PE13: P3.31
PE14: P3.32
PE15_CONVRUN2: P3.33 U201.12
PH0-OSC_IN: P4.7 SB20.2
PH1-OSC_OUT: P4.8 SB22.2
REFB2: CREFB200.2 U201.39
REFBP1: C129.1 P101.6 P104.2 U101.34
REFBP2: C229.1 P202.6 P205.2 U201.34
RS232_IN: P2.3 T30.4
RS232_OUT: P2.2 T30.5
VCC: C39.1 T30.18 T30.19
pads on no net: P3.35 P3.48 P204.1 P206.1 T30.3 T30.6 T30.7 T30.8 T30.9 T30.12 T30.25 U101.41 U150.1 U150.2 U150.3 U151.1 U151.2 U151.3 U152.1 U152.2 U152.3 U153.1 U153.2 U153.3 U154.1 U154.2 U154.3 U155.1 U155.2 U155.3 U156.1 U156.2 U156.3 U157.1 U157.2 U157.3 U201.41 U201.42 U201.43 U201.44 U201.45 U201.46 U201.47 U201.48 U201.49 U201.50 U201.51 U201.52 U201.53 U201.54 U201.55 U201.56 U201.57 U201.58 U201.59 U201.60 U201.61 U201.62 U201.63 U201.64 U201.65 U201.66 U201.67 U201.68 U201.69 U201.70 U201.71 U201.72 U201.73 U201.74 U201.75 U201.76 U201.77 U201.78 U201.79 U201.80 U201.81 U201.82 U201.83 U201.84 U201.85 U201.86 U201.87 U201.88 U201.89 U201.90 U201.91 U201.92 U201.93 U201.94 U201.95 U201.96 U201.97 U201.98 U201.99 U201.100 U250.1 U250.2 U250.3 U251.1 U251.2 U251.3
copper on no net:
  other v1: 13980.04,8435.04 14023.35,8435.04 14066.65,8435.04 14109.96,8435.04 13980.04,8478.35 14023.35,8478.35 14066.65,8478.35 14109.96,8478.35 13980.04,8521.65 14023.35,8521.65 14066.65,8521.65 14109.96,8521.65 13980.04,8564.96 14023.35,8564.96 14066.65,8564.96 14109.96,8564.96 8528.35,9758.35 8571.65,9758.35 8528.35,9801.65 8571.65,9801.65

## Text inside footprints (layer, text, board x,y; h text height)
C22: Top Overlay "+" at 10577.6,7815 h59.06 r90
C24: Top Overlay "+" at 9857.6,7815 h59.06 r90
P3: Top Overlay "2" at 8275,4165 h50 r90; Top Overlay "1" at 8375,4165 h50 r90; Top Overlay "49" at 8375,6745 h50 r90; Top Overlay "50" at 8275,6745 h50 r90
P4: Top Overlay "2" at 8535,4165 h50 r90; Top Overlay "1" at 8635,4165 h50 r90; Top Overlay "49" at 8635,6745 h50 r90; Top Overlay "50" at 8535,6745 h50 r90